# Altium PCB theswitch.PcbDoc
Units mm, origin at the board's own origin, x right, y up, seen from the top; angles counter-clockwise.
Board outline 100 x 60 mm, 2 copper layers (Top Layer, Bottom Layer); 74 components, 53 nets, 243 pads, 0 vias.
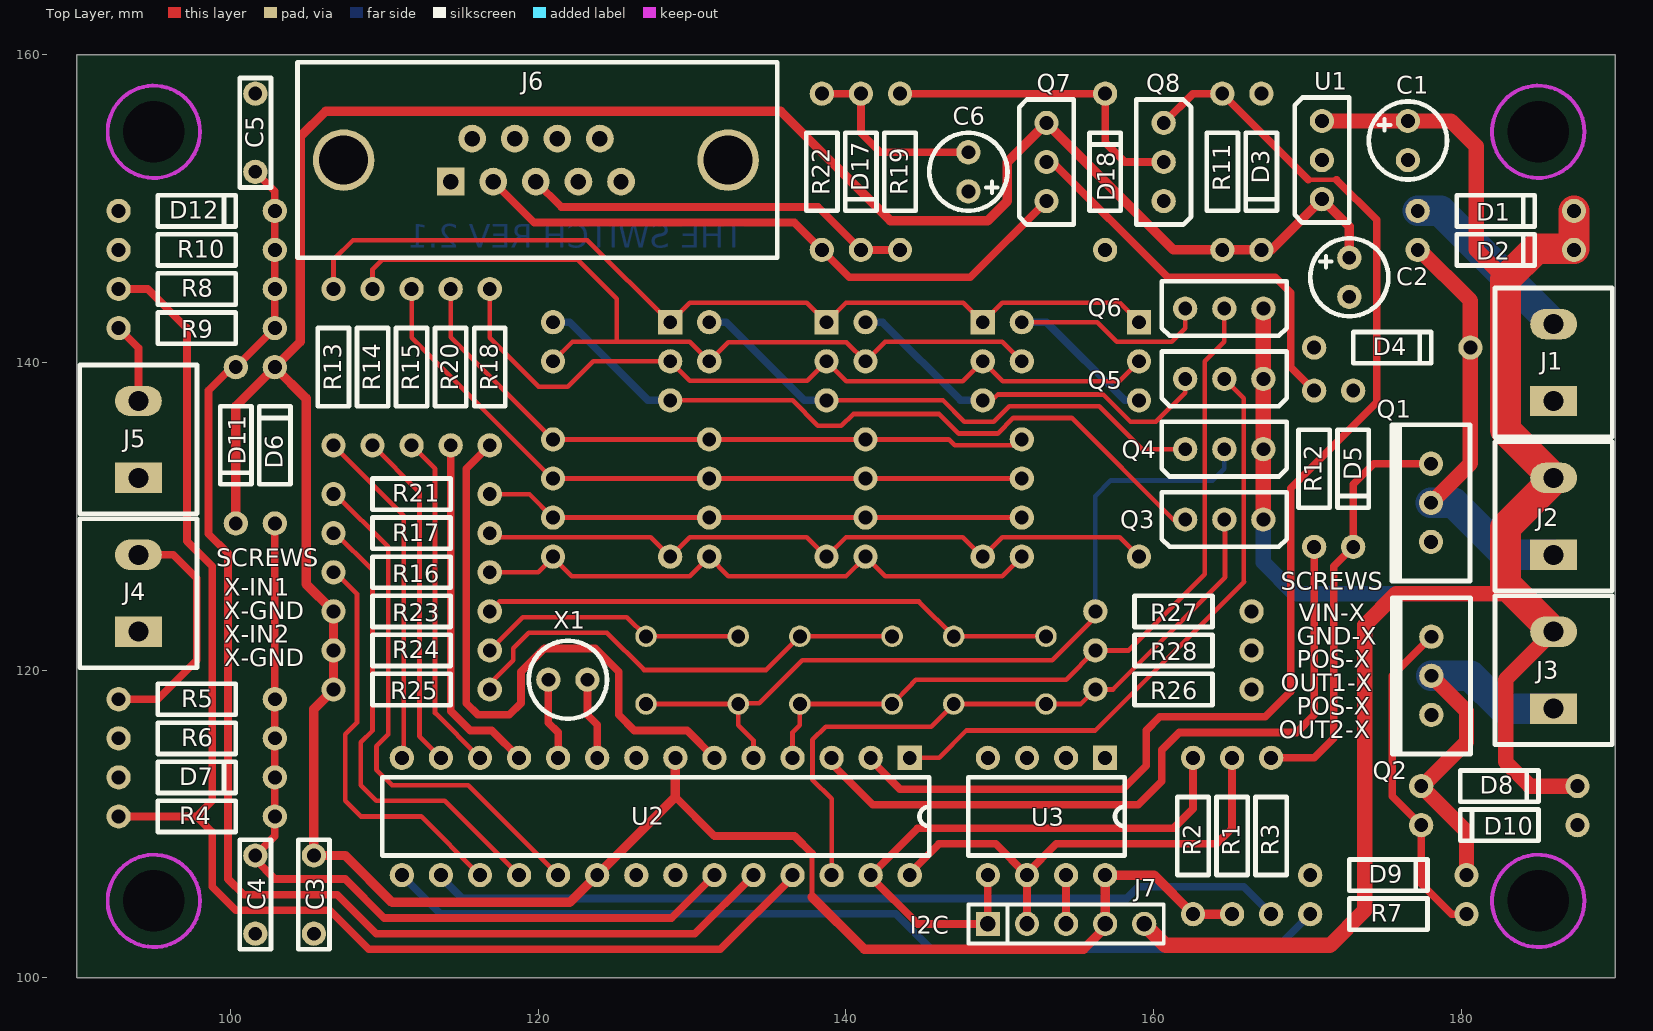
[diagram p0: Top Layer view]
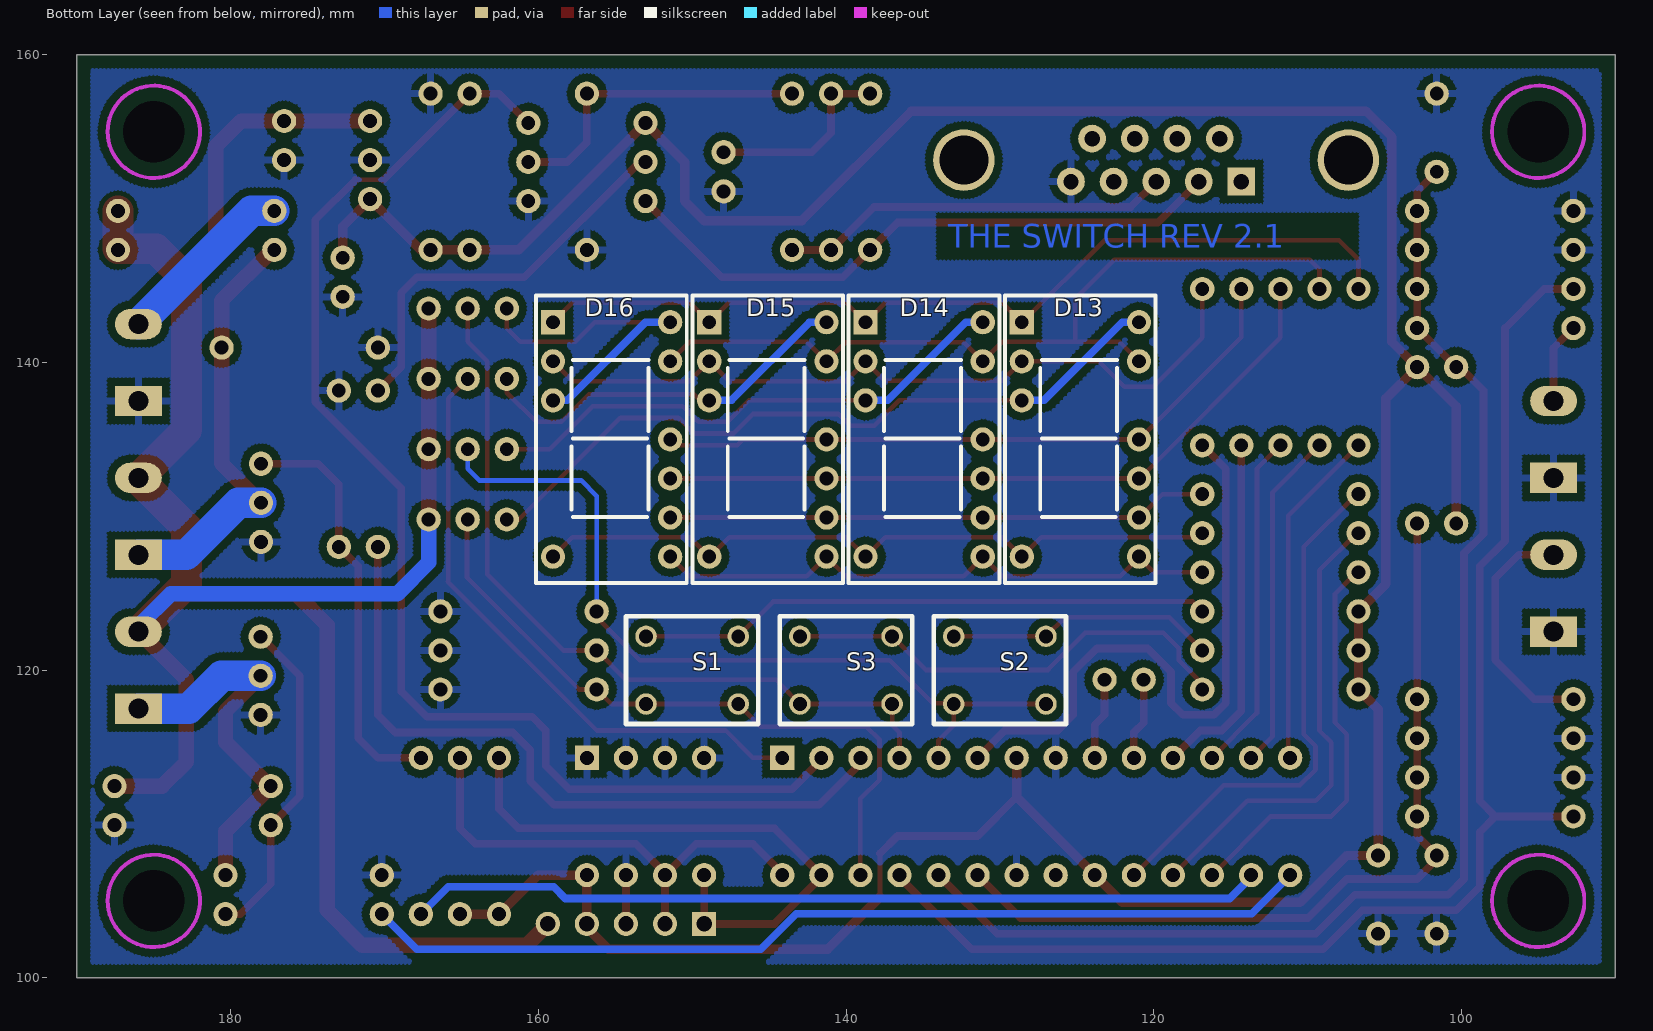
[diagram p1: Bottom Layer view, seen from below]

## Layer stack, top to bottom
Top Layer: signal copper 0.0356
Dielectric: dielectric 0.32, FR-4, Dk 4.8
Bottom Layer: signal copper 0.0356

## Board outline
90,100 190,100 190,160 90,160

## Design rules (kind name [scope] priority, off if disabled: settings)
Clearance poly [InNet('GND') And (OnLayer('Bottom Layer')) And InPoly] p1: gap=0.5
Clearance [OnLayer('Keep-Out Layer')] p2: gap=0
Clearance standard [All] p3: gap=0.305
ComponentClearance connector [(HasFootprint('MKD500S2'))] p1: gap=0 collisioncheckmode=3 verticalgap=0.254
ComponentClearance ComponentClearance_1 [All] p2: gap=0.025 collisioncheckmode=3 verticalgap=0.254
ComponentClearance [OnLayer('Keep-Out Layer')] p3 off: gap=0.254 collisioncheckmode=3 verticalgap=0.254
HoleSize [All] p1: absolutevalues=TRUE maxlimit=5 minlimit=0.254 maxpercent=80.000 minpercent=20.000
PolygonConnect [All] p1: connectstyle=Relief reliefconductorwidth=0.457 reliefentries=4 polygonreliefangle="90 Angle"
RoutingVias [All] p1: holewidth=0.711 width=1.27 viastyle="Through Hole" minholewidth=0.711 minwidth=1.27 maxholewidth=0.711 maxwidth=1.27
SolderMaskExpansion [All] p1: expansion=0.102
TestPointUsage [All] p1: valid=0 allowmultiple=FALSE
Testpoint [All] p1: side=15 testpointundercomponent=TRUE minsize=1.016 maxsize=2.54 preferedsize=1.524 minholesize=0 maxholesize=1.016 preferedholesize=0.813 testpointgrid=0.025 style=1023 order=0123456789
Width [All] p1: maxlimit=2.54 minlimit=0.305 preferedwidth=0.305
17 further rules are at their usual default settings.

## Components (designator, comment, footprint, x,y, rotation, side; value= is the part's Value field where it differs from the comment)
C1 "10UF 35V" RADIAL01P 176.53,155.702 r270 top
C2 "10UF 35V" RADIAL01P 172.72,146.812 r270 top
C3 "220N 50V" RAD02 105.41,107.95 r270 top
C4 "220N" RAD02 101.6,107.95 r270 top
C5 "220N" RAD02 101.6,152.4 r90 top
C6 "10UF 35V" RADIAL01P 147.955,151.13 r90 top
D1 "1N4001" DO35S 177.165,149.86 r0 top
D2 "1N4001" DO35S 177.165,147.32 r0 top
D3 "BZX79-5V6" DO35S 167.005,157.48 r270 top
D4 "1N4001" DO35S 170.434,140.97 r0 top
D5 "BZX79-5V6" DO35S 172.974,138.176 r270 top
D6 "1N4148" DO35S 102.87,129.54 r90 top
D7 "1N4148" DO35S 92.71,113.03 r0 top
D8 "1N4001" DO35S 177.395,112.465 r0 top
D9 "1N4001" DO35S 170.18,106.68 r0 top
D10 "BZX79-5V6" DO35S 187.555,109.925 r180 top
D11 "1N4148" DO35S 100.33,139.7 r270 top
D12 "1N4148" DO35S 92.71,149.86 r0 top
D13 "LED" TOS4102 128.57,127.38 r180 bottom locked
D14 "LED" TOS4102 138.73,127.38 r180 bottom locked
D15 "LED" TOS4102 148.89,127.38 r180 bottom locked
D16 "LED" TOS4102 159.05,127.38 r180 bottom locked
D17 "1N6263" DO35S 140.97,157.48 r270 top
D18 "1N4148" DO35S 156.845,147.32 r90 top
J1 "SCREW" MKD500S2 186,137.5 r90 top locked
J2 "SCREW" MKD500S2 186,127.5 r90 top locked
J3 "SCREW" MKD500S2 186,117.5 r90 top locked
J4 "SCREW" MKD500S2 94,122.5 r90 top locked
J5 "SCREW" MKD500S2 94,132.5 r90 top locked
J6 "DB9" DB9S 114.3,151.765 r0 top
J7 "SIL5" SIL5 149.225,103.505 r0 top
Q1 "BD139" TO220V 178.03,128.34 r90 top
Q2 "BD139" TO220V 178.054,117.094 r90 top
Q3 "BC548" TO92 162.052,129.794 r0 top
Q4 "BC548" TO92 162.052,134.366 r0 top
Q5 "BC548" TO92 162.052,138.938 r0 top
Q6 "BC548" TO92 162.052,143.51 r0 top
Q7 "BC558" TO92 153.035,155.575 r270 top
Q8 "BC548" TO92 160.655,150.495 r90 top
R1 "4K7" AXIAL04 165.1,114.3 r270 top
R2 "4K7" AXIAL04 162.56,114.3 r270 top
R3 "4K7" AXIAL04 167.64,114.3 r270 top
R4 "4K7" AXIAL04 92.71,110.49 r0 top
R5 "LINK" AXIAL04 92.71,118.11 r0 top
R6 "VACANT" AXIAL04 102.87,115.57 r180 top
R7 "4K7" AXIAL04 180.34,104.14 r180 top
R8 "4K7" AXIAL04 92.71,144.78 r0 top
R9 "LINK" AXIAL04 92.71,142.24 r0 top
R10 "VACANT" AXIAL04 102.87,147.32 r180 top
R11 "4K7" AXIAL04 164.465,157.48 r270 top
R12 "4K7" AXIAL04 170.434,128.016 r90 top
R13 "100R" AXIAL04 106.68,134.62 r90 top
R14 "100R" AXIAL04 109.22,134.62 r90 top
R15 "100R" AXIAL04 111.76,134.62 r90 top
R16 "100R" AXIAL04 106.68,126.365 r0 top
R17 "100R" AXIAL04 106.68,128.905 r0 top
R18 "100R" AXIAL04 116.84,134.62 r90 top
R19 "4K7" AXIAL04 143.51,157.48 r270 top
R20 "100R" AXIAL04 114.3,134.62 r90 top
R21 "100R" AXIAL04 106.68,131.445 r0 top
R22 "4K7" AXIAL04 138.43,157.48 r270 top
R23 "4K7" AXIAL04 116.84,123.825 r180 top
R24 "4K7" AXIAL04 116.84,121.285 r180 top
R25 "4K7" AXIAL04 116.84,118.745 r180 top
R26 "100K" AXIAL04 166.37,118.745 r180 top
R27 "100K" AXIAL04 166.37,123.825 r180 top
R28 "100K" AXIAL04 166.37,121.285 r180 top
S1 "BUTTON" SWPB 150,120 r270 bottom locked
S2 "BUTTON" SWPB 130,120 r270 bottom locked
S3 "BUTTON" SWPB 140,120 r270 bottom locked
U1 "LP2950-5V" TO92 170.942,155.702 r270 top
U2 "ATMEGA8L-8PU" DIP28N 144.145,114.3 r270 top
U3 "AT24C08B" DIP8 156.845,114.3 r270 top
X1 "32.768KHz" RADIAL01 123.19,119.38 r180 top

## Footprints (in the part's own frame and the unit in brackets; to place one, negate y for a bottom-side part, rotate by r counter-clockwise, add the part's x,y. Pads: shape width x height; smd on the part's side, far side on the other; paste and mask are expansions set on the pad)
AXIAL04 [mil]
  round 62 hole 35.43: 1(0,0) 2(400,0)
  silkscreen extent 100,-40 300,40
DB9S [mm]
  round 4 hole 3.2: 0(-6.963,1.397) 0(18.037,1.397)
  rect 1.8x1.8 hole 1: 1(0,0)
  round 1.8 hole 1: 2(2.769,0) 3(5.537,0) 4(8.306,0) 5(11.074,0) 6(1.397,2.794) 7(4.166,2.794) 8(6.934,2.794) 9(9.703,2.794)
  silkscreen extent -9.96,-4.95 21.23,7.75
DIP8 [mil]
  rect 62x62 hole 35.43: 1(0,0)
  round 62 hole 35.43: 2(0,-100) 3(0,-200) 4(0,-300) 5(300,-300) 6(300,-200) 7(300,-100) 8(300,0)
  silkscreen extent 50,-350 250,50
DIP28N [mil]
  rect 62x62 hole 35.43: 1(0,0)
  round 62 hole 35.43: 2(0,-100) 3(0,-200) 4(0,-300) 5(0,-400) 6(0,-500) 7(0,-600) 8(0,-700) 9(0,-800) 10(0,-900) 11(0,-1000) 12(0,-1100) 13(0,-1200) 14(0,-1300) 15(300,-1300) 16(300,-1200) 17(300,-1100) 18(300,-1000) 19(300,-900) 20(300,-800) 21(300,-700) 22(300,-600) 23(300,-500) 24(300,-400) 25(300,-300) 26(300,-200) 27(300,-100) 28(300,0)
  silkscreen extent 50,-1350 250,50
DO35S [mil]
  round 62 hole 35.43: 1(0,0) 2(400,0)
  silkscreen extent 100,-40 300,40
MKD500S2 [mil]
  rect 78x120 hole 51.18: 1(0,0)
  oval 78x120 hole 51.18: 2(196.85,0)
  silkscreen extent -92,-150 289,150
RAD02 [mil]
  round 62 hole 35.43: 1(0,0) 2(200,0)
  silkscreen extent -40,-40 240,40
RADIAL01 [mil]
  round 62 hole 35.43: 1(0,0) 2(100,0)
  silkscreen extent -50,-100 150,100
RADIAL01P [mil]
  round 62 hole 35.43: 1(0,0) 2(100,0)
  silkscreen extent -50,-100 150,100
SIL5 [mil]
  rect 62x62 hole 39.37: 1(0,0)
  round 62 hole 39.37: 2(100,0) 3(200,0) 4(300,0) 5(400,0)
  silkscreen extent -50,-50 450,50
SWPB [mm]
  round 1.4 hole 0.9: 1(-2.2,3) 2(2.2,3) 3(-2.2,-3) 4(2.2,-3)
  silkscreen extent -3.5,-4.3 3.5,4.3
TO92 [mil]
  round 62 hole 35.43: 1(0,0) 2(100,0) 3(200,0)
  silkscreen extent -60,-70 260,70
TO220V [mil]
  round 62 hole 35.43: 1(0,0) 2(100,0) 3(200,0)
  silkscreen extent -100,-100 300,100
TOS4102 [mil] "LED 7 SEGMENT"
  rect 62x62 hole 35.43: 1(0,600)
  round 62 hole 35.43: 2(0,500) 3(0,400) 7(0,0) 8(300,0) 9(300,100) 10(300,200) 11(300,300) 13(300,500) 14(300,600)
  silkscreen extent -43,-68 343,668

## Part data
C1 C6: library part CAPPOL, "CAPACITOR ELECTROLYTIC"
C2 C3: library part "CAPACITOR POL", "CAPACITOR"
C4 C5: library part CAPACITOR, "CAPACITOR"
D3 D5 D10: library part BZX79, "BZX79"
D6 D7 D11 D12 D17 D18: library part 1N4001, "1N4001"
D13 D14 D15 D16: library part DISP7SEG, "LED DISPLAY 7 SEGMENT"
J1 J2 J3 J4 J5: library part CON2, "CONNECTOR"
J6: library part CON6, "CONNECTOR"
J7: library part CON5, "CONNECTOR"
R1 R2 R11 R12 R19 R22 R23 R24 R25 R26 R27 R28: library part RES, "RES"
R3 R5 R6 R7 R9: library part RES, "10K"
R4 R8 R10 R13 R14 R15 R16 R17 R18 R20 R21: library part RES
S1 S2 S3: "PUSH BUTTON SWITCH"
U1: library part LP2950, "LP2950"
U2: "MICROCONTROLLER"
U3: "I2C 8KBIT EEPROM"
X1: library part XTAL, "CRYSTAL"

## Free pads (board coordinates)
  round 0 hole 4 unplated: 0(95,105) 0(95,155) 0(185,105) 0(185,155)

## Nets (pads, with @x,y where several pads share a name; then routed paths per layer and width w, separated by ;. In a path a pad name is that pad's centre, name@x,y a point inside that pad or via, vN(x,y) a via of type N, cw(c..) or ccw(c..) an arc to the next point about the centre after c; other vN are vias at no path point)
5V: C2.1 C3.1 D3.2 D6.2 D11.2 J7.4 Q7.1 R1.2 R2.2 R11.2 R23.2 R24.2 R25.2 U1.3 U2.7 U2.20 U3.8 | length 221.4
  Top Layer w0.305: 137.795,105.258 137.795,108.077
  Top Layer w0.5: 128.905,111.76 131.445,109.22 136.652,109.22 137.795,108.077
  Top Layer w0.61: D11.2 100.33,137.16 104.521,141.351 104.521,154.686 106.172,156.337 135.763,156.337 142.875,149.225 149.225,149.225 150.495,150.495 150.495,153.035 Q7.1 161.29,147.32 167.64,147.32 U1.3 172.72,148.844 C2.1 ; D6.2 104.902,137.668 104.902,125.603 R23.2 R25.2 105.41,117.475 C3.1 107.442,107.95 110.49,104.902 122.047,104.902 128.905,111.76 U2.7 ; 137.795,105.258 141.199,101.854 155.448,101.854 156.845,103.251 U3.8 160.02,106.68 R2.2 R1.2
AUX5V: R4.1 R8.1 U2.25 | length 89.9
  Top Layer w0.5: R4.1 97.79,110.49 ; R8.1 94.615,144.78 97.155,142.24 97.155,128.397 98.806,126.746 98.806,111.506 97.79,110.49 ; U2.25 136.525,106.553 131.826,101.854 108.966,101.854 106.426,104.394 100.33,104.394 98.806,105.918 98.806,109.474 97.79,110.49
DP: D13.9 D14.9 D15.9 D16.9 R21.2 | length 35.2
  Top Layer w0.305: R21.2 119.425,131.445 D13.9 D16.9
GND: C1.2 C2.2 C3.2 C4.2 C5.2 C6.1 D3.1 D4.1 D5.1 D7.1 D9.1 D10.1 D12.1 D18.1 J1.1 J4.1 J5.1 J6.5 J7.3 Q1.1 Q2.1 Q8.1 R6.2 R10.2 R26.1 R27.1 R28.1 U1.2 U2.8 U2.22 U3.1 U3.2 U3.3 U3.4 U3.7 | length 3.2
  Top Layer w0.5: J7.3 U3.7
NetC4_1: C4.1 D6.1 D7.2 R4.2 R5.2 R6.1 U2.23 | length 55
  Top Layer w0.305: C4.1@101.6,107.696 C4.1
  Top Layer w0.5: C4.1@101.6,107.696 102.87,106.426 107.442,106.426 109.982,103.886 128.651,103.886 U2.23 ; C4.1 102.87,109.22 D6.1
NetC5_1: C5.1 D11.1 D12.2 R8.2 R9.2 R10.1 U2.24 | length 86.3
  Top Layer w0.305: D11.1@100.076,139.7 D11.1@100.584,139.7
  Top Layer w0.5: D11.1@100.076,139.7 98.552,138.176 98.552,128.862 99.822,127.592 99.822,106.426 100.838,105.41 106.934,105.41 109.474,102.87 130.175,102.87 U2.24 ; D11.1@100.457,139.827 R9.2 102.87,151.13 C5.1
NetC6_2: C6.2 D17.1 R22.1 | length 12.6
  Top Layer w0.5: R22.1 D17.1 140.97,154.94 142.24,153.67 C6.2
NetD1_1: D1.1 J1.2 | length 13
  Top Layer w1: J1.2@185.46,142.5 J1.2
  Bottom Layer w1: J1.2@185.46,142.5 J1.2
  Bottom Layer w2: D1.1 178.64,149.86 J1.2
NetD2_1: D2.1 D4.2 J2.1 Q1.2 | length 28.4
  Top Layer w1: D2.1 177.292,147.32 180.594,144.018 180.594,133.444 Q1.2
  Bottom Layer w2: Q1.2 179.508,130.88 182.888,127.5 J2.1
NetD5_2: D5.2 Q1.3 R3.1 | length 27.2
  Top Layer w0.5: R3.1 170.434,114.3 171.704,115.57 171.704,126.746 D5.2 172.974,132.08 174.314,133.42 Q1.3
NetD8_1: D8.1 D9.2 J3.1 Q2.2 | length 25.2
  Top Layer w1: Q2.2 180.34,117.348 180.34,115.316 177.489,112.465 D8.1 180.34,109.52 D9.2
  Bottom Layer w2: Q2.2 180.594,119.634 182.728,117.5 J3.1
NetD10_2: D10.2 Q2.3 R7.1 | length 21.7
  Top Layer w0.5: Q2.3 175.514,119.634 175.514,111.806 D10.2 177.395,106.115 179.37,104.14 R7.1
NetD13_3: D13.3 D13.14 Q3.1 | length 47.9
  Top Layer w0.305: D13.3 136.526,137.54 138.176,135.89 139.7,135.89 140.462,136.652 146.05,136.652 147.32,135.382 149.86,135.382 150.876,136.398 154.686,136.398 161.29,129.794 Q3.1
  Bottom Layer w0.5: D13.14 122.048,142.62 127.128,137.54 D13.3
NetD14_3: D14.3 D14.14 Q4.1 | length 35.2
  Top Layer w0.305: D14.3 146.305,137.54 147.701,136.144 149.606,136.144 150.622,137.16 156.464,137.16 159.258,134.366 Q4.1
  Bottom Layer w0.5: D14.14 132.208,142.62 137.288,137.54 D14.3
NetD15_3: D15.3 D15.14 Q5.1 | length 25.5
  Top Layer w0.305: D15.3 149.478,137.54 149.86,137.922 156.718,137.922 158.496,136.144 160.147,136.144 162.052,138.049 Q5.1
  Bottom Layer w0.5: D15.14 142.368,142.62 147.448,137.54 D15.3
NetD16_3: D16.3 D16.14 Q6.1 | length 22.5
  Top Layer w0.305: D16.14 156.338,142.62 157.607,141.351 161.163,141.351 162.052,142.24 Q6.1
  Bottom Layer w0.5: D16.14 153.036,142.62 158.116,137.54 D16.3
NetD17_2: D17.2 J6.3 R19.2 | length 25.5
  Top Layer w0.5: J6.3 121.488,150.114 138.176,150.114 D17.2 R19.2
NetD18_2: D18.2 Q8.2 R19.1 | length 20.8
  Top Layer w0.5: R19.1 D18.2 156.845,154.305 158.115,153.035 Q8.2
NetJ4_2: J4.2 R5.1 | length 15.9
  Top Layer w0.5: R5.1 95.25,118.11 97.79,120.65 97.79,125.984 96.274,127.5 J4.2
NetJ5_2: J5.2 R9.1 | length 5.3
  Top Layer w0.5: R9.1 94,140.95 J5.2
NetJ6_2: J6.2 Q7.3 R22.2 | length 40.6
  Top Layer w0.5: J6.2 119.736,149.098 136.652,149.098 140.208,145.542 148.082,145.542 Q7.3
NetJ7_1: J7.1 R2.1 U2.27 U3.5 | length 38.2
  Top Layer w0.5: U3.5 J7.1 144.653,103.505 141.605,106.553 U2.27 144.653,109.728 161.29,109.728 162.56,110.998 R2.1
NetJ7_2: J7.2 R1.1 U2.28 U3.6 | length 31.7
  Top Layer w0.5: U2.28 144.145,106.807 146.05,108.712 149.733,108.712 U3.6 ; J7.2@151.765,103.632 151.765,106.807 153.67,108.712 164.084,108.712 165.1,109.728 R1.1
NetQ3_2: Q3.2 R26.2 S1.2 S1.4 U2.26 | length 44.2
  Top Layer w0.305: U2.26 139.065,111.633 137.82,112.878 137.82,115.468 138.684,116.332 145.542,116.332 147,117.79 S1.2 155.265,117.8 R26.2 157.353,118.745 164.643,126.035 Q3.2@164.643,129.743
NetQ4_2: Q4.2 R27.2 S2.2 S2.4 U2.5 | length 53.7
  Top Layer w0.305: S2.2 S2.4 ; U2.5 133.985,115.443 133,116.428 S2.4 ; R27.2 156.21,123.444 153.416,120.65 137.16,120.65 134.366,117.856 133.056,117.856 S2.4
  Bottom Layer w0.305: R27.2 156.21,131.318 157.226,132.334 163.83,132.334 164.592,133.096 Q4.2
NetQ5_2: Q5.2 U2.1 | length 40.2
  Top Layer w0.305: U2.1 146.05,114.3 147.828,116.078 156.21,116.078 165.887,125.755 ; Q5.2 165.862,137.668 165.862,125.781
NetQ6_2: Q6.2 R28.2 S3.2 S3.4 U2.4 | length 51.3
  Top Layer w0.305: U2.4 136.525,115.951 137,116.426 S3.2 S3.4 144.272,119.072 144.272,119.126 144.526,119.38 154.305,119.38 R28.2 158.369,121.285 163.322,126.238 163.322,140.081 164.592,141.351 Q6.2
NetQ7_2: Q7.2 R12.2 | length 26.4
  Top Layer w0.5: Q7.2 153.416,153.035 160.909,145.542 167.894,145.542 168.91,144.526 168.91,139.7 R12.2
NetQ8_3: Q8.3 R11.1 U2.2 | length 83.2
  Top Layer w0.305: 170.053,151.892 171.882,151.892
  Top Layer w0.5: U2.2 141.605,114.173 143.51,112.268 157.988,112.268 159.512,113.792 159.512,115.57 159.512,116.078 160.401,116.967 167.259,116.967 168.91,118.618 168.91,131.826 174.498,137.414 174.498,149.276 171.882,151.892 ; Q8.3 162.56,157.48 R11.1 170.053,151.892
NetR3_2: R3.2 U2.16 | length 55.7
  Bottom Layer w0.5: U2.16 113.665,106.553 115.062,105.156 158.242,105.156 159.004,105.918 165.862,105.918 R3.2
NetR7_2: R7.2 U2.15 | length 62
  Bottom Layer w0.5: U2.15 113.633,104.172 143.224,104.172 145.542,101.854 167.894,101.854 R7.2
NetR12_1: R12.1 U2.3 | length 47.5
  Top Layer w0.305: U2.3@139.065,114.173 U2.3
  Top Layer w0.5: U2.3 139.065,113.919 141.732,111.252 159.004,111.252 160.528,112.776 160.528,114.808 161.671,115.951 169.291,115.951 170.434,117.094 R12.1
NetR13_1: R13.1 U2.14 | length 22.3
  Top Layer w0.305: R13.1 111.252,130.048 111.252,114.427 U2.14
NetR14_1: R14.1 U2.13 | length 22.2
  Top Layer w0.305: R14.1 112.268,131.572 112.268,115.697 U2.13
NetR15_1: R15.1 U2.12 | length 22.2
  Top Layer w0.305: R15.1 113.284,133.096 113.284,117.221 U2.12
NetR16_1: R16.1 U2.17 | length 26.6
  Top Layer w0.305: R16.1 106.807,126.365 108.204,124.968 108.204,116.586 107.442,115.824 107.442,111.506 108.458,110.49 112.395,110.49 U2.17
NetR17_1: R17.1 U2.18 | length 30.5
  Top Layer w0.305: R17.1 106.807,128.905 109.22,126.492 109.22,116.078 108.458,115.316 108.458,112.522 109.474,111.506 113.919,111.506 U2.18
NetR18_1: R18.1 U2.6 | length 41.4
  Top Layer w0.5: R18.1 115.316,133.096 115.316,117.856 116.078,117.094 118.11,117.094 118.872,117.856 118.872,119.888 120.396,121.412 123.698,121.412 125.222,119.888 125.222,117.094 126.238,116.078 129.667,116.078 U2.6
NetR20_1: R20.1 U2.11 | length 23
  Top Layer w0.5: R20.1 114.3,117.348 115.57,116.078 116.967,116.078 U2.11
NetR21_1: R21.1 U2.19 | length 34.4
  Top Layer w0.305: R21.1 106.807,131.445 110.236,128.016 110.236,115.824 109.474,115.062 109.474,113.538 110.49,112.522 115.443,112.522 U2.19
NetR23_1: R23.1 S1.1 S1.3 | length 37.4
  Top Layer w0.305: R23.1 117.475,124.46 144.74,124.46 S1.1 S1.3
NetR24_1: R24.1 S2.1 S2.3 | length 18.1
  Top Layer w0.305: R24.1 118.999,123.444 125.756,123.444 S2.1 S2.3 S2.3@132.645,122.555
NetR25_1: R25.1 S3.1 S3.3 | length 30.3
  Top Layer w0.305: R25.1 116.84,119.126 118.364,120.65 118.364,121.412 119.38,122.428 124.46,122.428 126.873,120.015 134.815,120.015 S3.1 S3.3
NetU2_9: U2.9 X1.1 | length 5.3
  Top Layer w0.5: X1.1 123.19,117.094 123.825,116.459 U2.9
NetU2_10: U2.10 X1.2 | length 5.3
  Top Layer w0.5: X1.2 120.65,116.586 121.285,115.951 U2.10
SA: D13.1 D14.1 D15.1 D16.1 R13.2 | length 60.3
  Top Layer w0.305: R13.2 106.68,146.685 107.95,147.955 123.19,147.955 128.498,142.647 128.498,142.62 D13.1 129.841,143.891 137.439,143.891 D14.1@138.71,142.62 ; D14.1@138.683,142.62 D14.1 140.001,143.891 147.625,143.891 148.89,142.626 D15.1 ; D15.1@148.818,142.62 D15.1 ; D16.1@159.003,142.62 D16.1 159.05,142.626 157.785,143.891 150.161,143.891 D15.1
SB: D13.13 D14.13 D15.13 D16.13 R14.2 | length 54.9
  Top Layer w0.305: R14.2 109.22,146.05 109.855,146.685 122.555,146.685 125.095,144.145 125.095,141.351 ; D13.13 122.221,141.351 129.845,141.351 131.11,140.086 D14.13 132.356,141.326 140.03,141.326 141.27,140.086 D15.13 142.541,141.351 150.165,141.351 151.43,140.086 D16.13
SC: D13.10 D14.10 D15.10 D16.10 R15.2 | length 46.6
  Top Layer w0.305: R15.2 111.76,141.605 120.905,132.46 D16.10
SD: D13.8 D14.8 D15.8 D16.8 R16.2 | length 38.2
  Top Layer w0.305: R16.2 119.98,126.365 D13.8@120.95,127.335 ; D13.8 D13.8@120.95,127.335 ; D16.8 150.161,126.111 142.545,126.111 141.276,127.38 D15.8 140.001,126.111 132.359,126.111 131.11,127.36 D14.8 129.841,126.111 122.174,126.111 D13.8@120.95,127.335
SE: D13.7 D14.7 D15.7 D16.7 R17.2 | length 46
  Top Layer w0.305: R17.2 117.094,128.651 127.299,128.651 D13.7 129.841,128.651 137.439,128.651 138.71,127.38 D14.7 140.001,128.651 147.599,128.651 148.87,127.38 D15.7 150.161,128.651 157.785,128.651 159.05,127.386 D16.7
SF: D13.2 D14.2 D15.2 D16.2 R18.2 | length 50.6
  Top Layer w0.305: R18.2 116.84,141.605 120.015,138.43 121.92,138.43 123.57,140.08 D13.2 129.839,138.811 137.49,138.811 138.73,140.051 D14.2 140.024,138.786 147.599,138.786 148.89,140.076 D15.2 150.184,138.786 157.759,138.786 159.05,140.076 D16.2
SG: D13.11 D14.11 D15.11 D16.11 R20.2 | length 43.4
  Top Layer w0.305: R20.2 114.3,141.65 D13.11 ; D13.11@120.905,135 146.686,135 147.066,134.62 151.05,134.62 D16.11
VIN: C1.1 D1.2 D2.2 D8.2 J2.2 J3.2 J7.5 Q3.3 Q4.3 Q5.3 Q6.3 U1.1 | length 152.6
  Top Layer w1: J7.5 160.782,102.108 171.45,102.108 173.736,104.394 173.736,122.936 175.768,124.968 183.532,124.968 ; Q3.3 Q6.3 ; U1.1 179.324,155.702 180.975,154.051 180.975,147.32 182.88,145.415 ; J3.2 182.88,119.38 182.88,114.046 184.461,112.465 D8.2 ; J3.2@186.182,122.682 J3.2@186.436,122.428
  Top Layer w2: J3.2 182.88,125.62 182.88,129.286 186,132.406 J2.2 182.88,135.62 182.88,145.415 184.855,147.39 187.325,147.39 D1.2
  Bottom Layer w1: Q3.3 167.132,127 169.164,124.968 183.896,124.968 186,122.864 J3.2
pads on no net: J6.0 J6.1 J6.4 J6.6 J6.7 J6.8 J6.9 U2.21

## Polygon pours and split planes (outlines as drawn)
GND on Bottom Layer "Top Layer-No Net" (hatched 90Degree grid 0.254 track 0.305, remove dead copper, pour order 1000): 91,101 189,101 189,159 91,159

## Keep-outs
Keep-Out Layer:
  circle w0.254: c185,105 r3
  circle w0.254: c185,155 r3
  circle w0.254: c95,105 r3
  circle w0.254: c95,155 r3

## Other copper
Bottom Layer:
  text "THE SWITCH REV 2.1" at 133.35,147.447 h1.52

## Silkscreen, mask and mechanical layers (free items; w line width, h text height)
Top Overlay:
  text "SCREWS" at 99.06,126.746 h1.14
  text "SCREWS" at 168.275,125.222 h1.14
  text "X-IN1" at 99.568,124.841 h1.14
  text "X-GND" at 99.568,123.317 h1.14
  text "VIN-X" at 169.418,123.19 h1.14
  text "X-IN2" at 99.568,121.793 h1.14
  text "GND-X" at 169.291,121.666 h1.14
  text "X-GND" at 99.568,120.269 h1.14
  text "POS-X" at 169.291,120.142 h1.14
  text "OUT1-X" at 168.275,118.618 h1.14
  text "POS-X" at 169.291,117.094 h1.14
  text "OUT2-X" at 168.148,115.57 h1.14
  text "I2C" at 144.145,102.87 h1.14
Mechanical 1:
  the board outline again, w0.025